# Altium PCB 175-00016_rev2 SuperFin GPIO Apps Board.PcbDoc (part 1 of 2)
Units mil, origin at the board's own origin, x right, y up, seen from the top; angles counter-clockwise.
Board outline 3307.09 x 1358.27 mil, 6 copper layers (Top Layer (*.GTL), Mid-Layer 1 (*.G1), Internal Plane 1 (*.GP1), Internal Plane 2 (GP2), Internal Plane 3 (GP3), Bottom Layer (GBL)); 57 components, 95 nets, 358 pads, 100 vias.
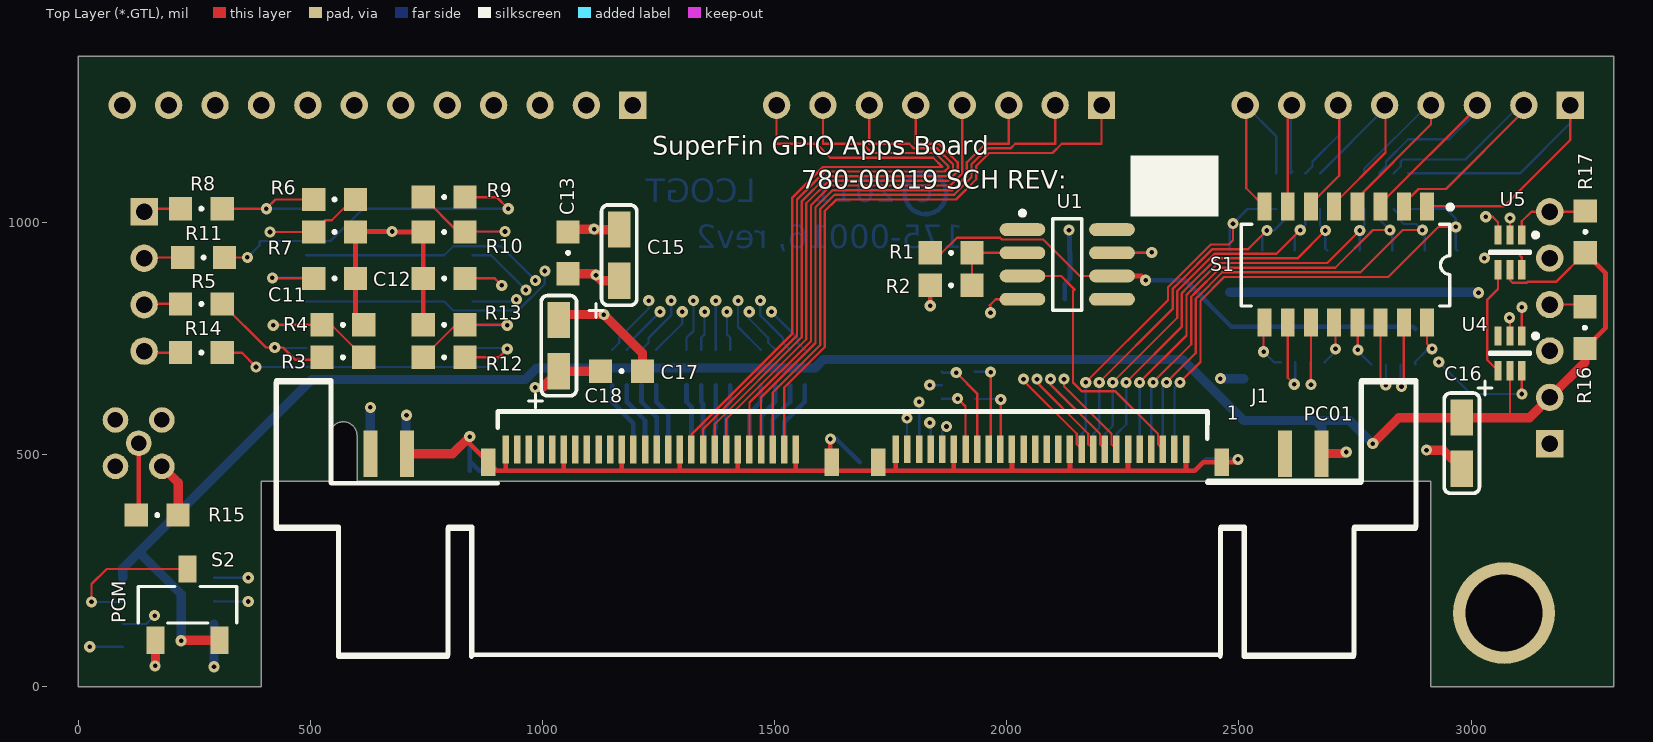
[diagram p0: Top Layer (*.GTL) view]
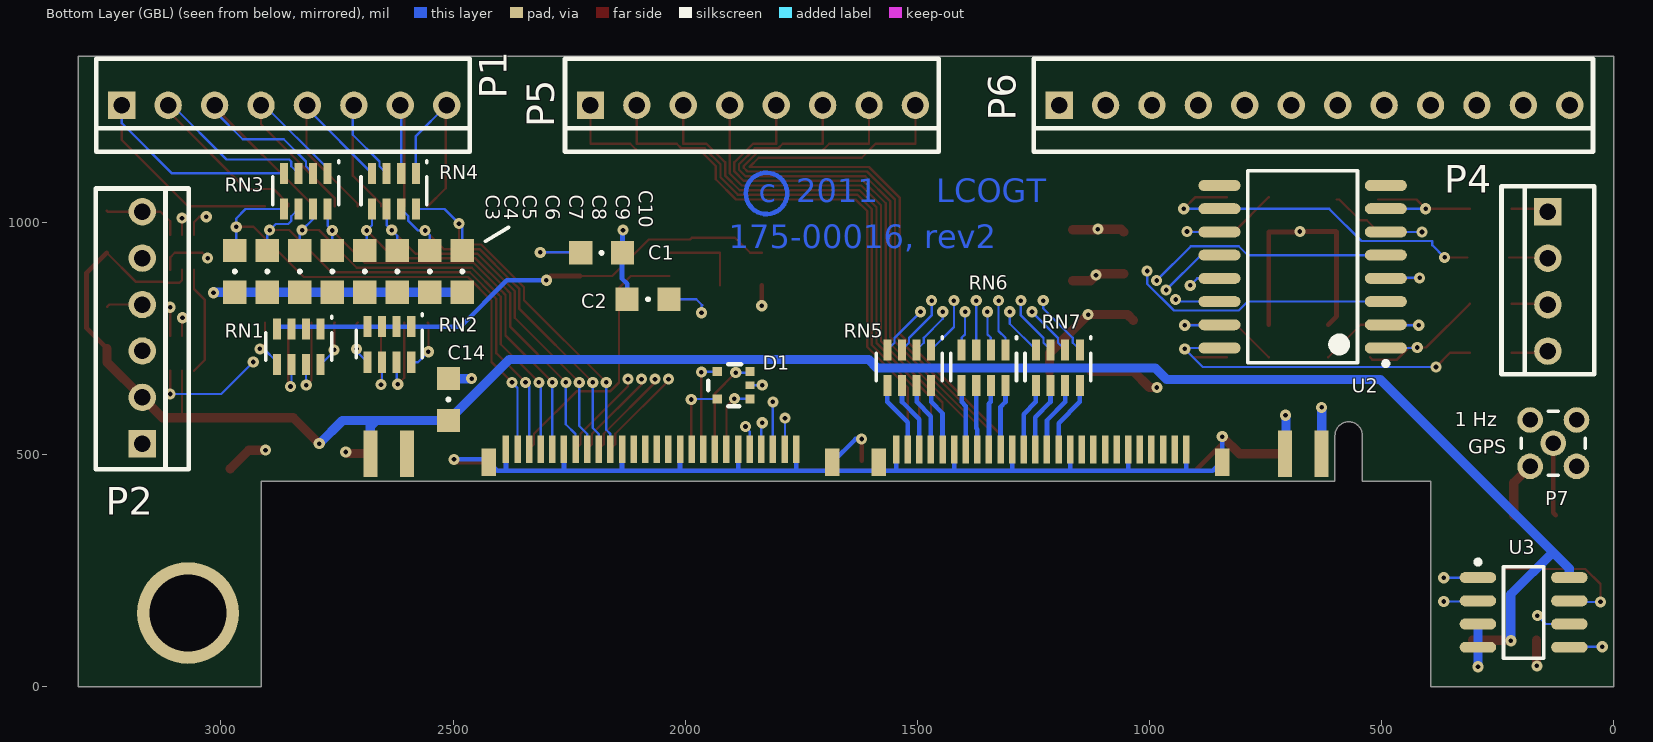
[diagram p1: Bottom Layer (GBL) view, seen from below]
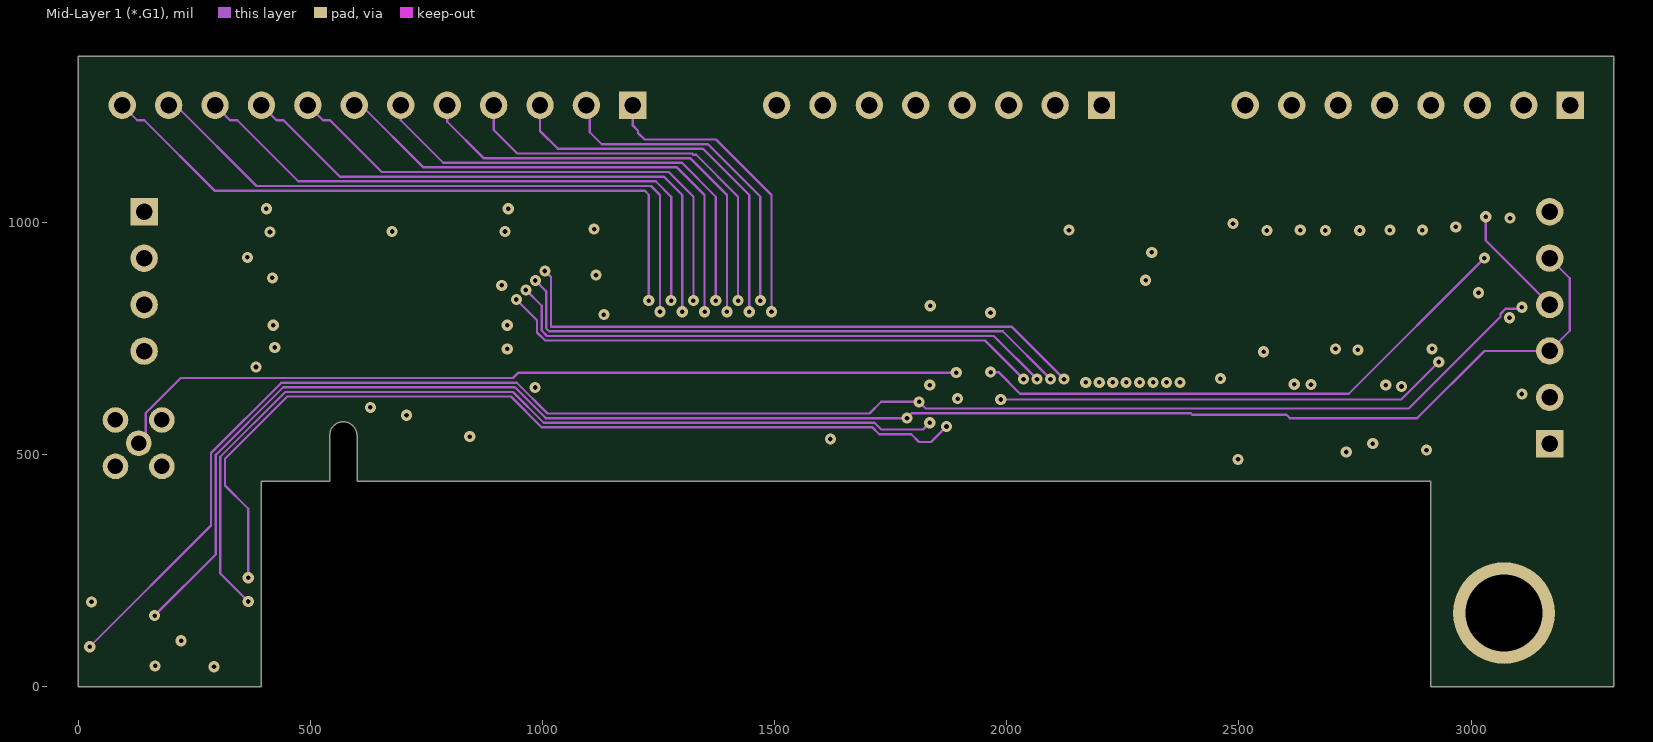
[diagram p2: Mid-Layer 1 (*.G1)]
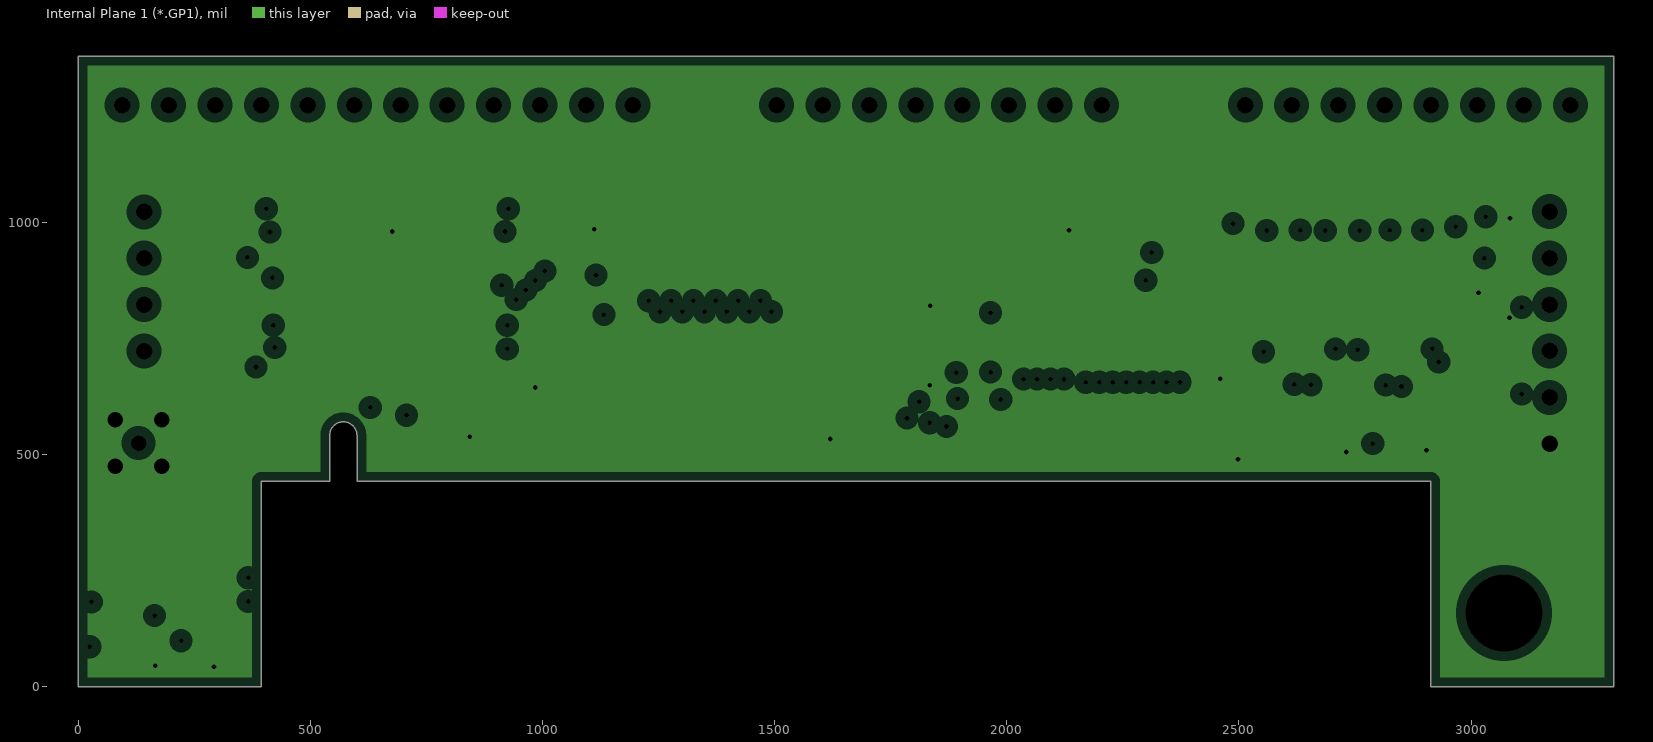
[diagram p3: Internal Plane 1 (*.GP1), clearances drawn from the general rule]
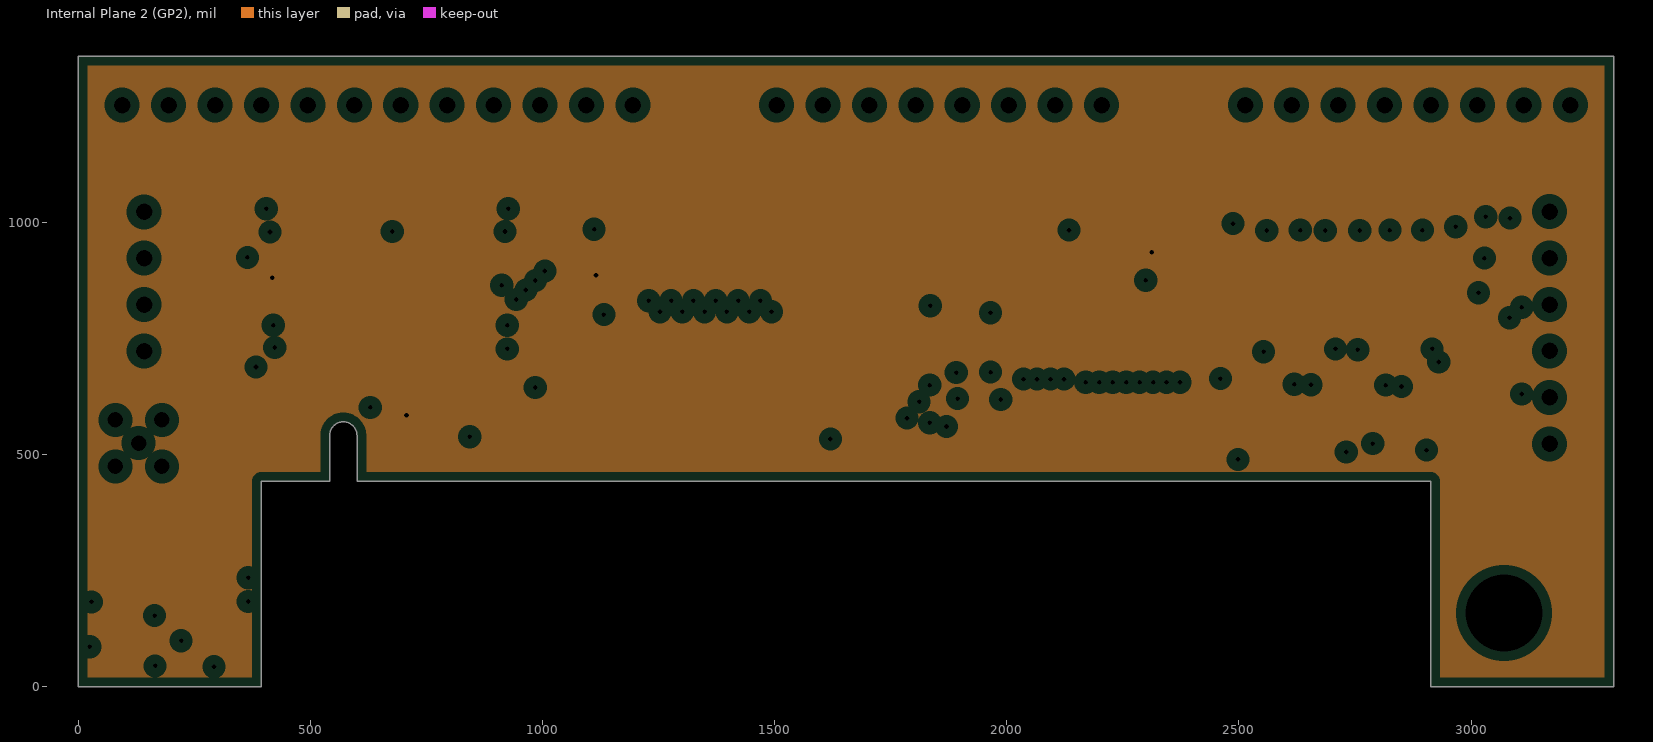
[diagram p4: Internal Plane 2 (GP2), clearances drawn from the general rule]
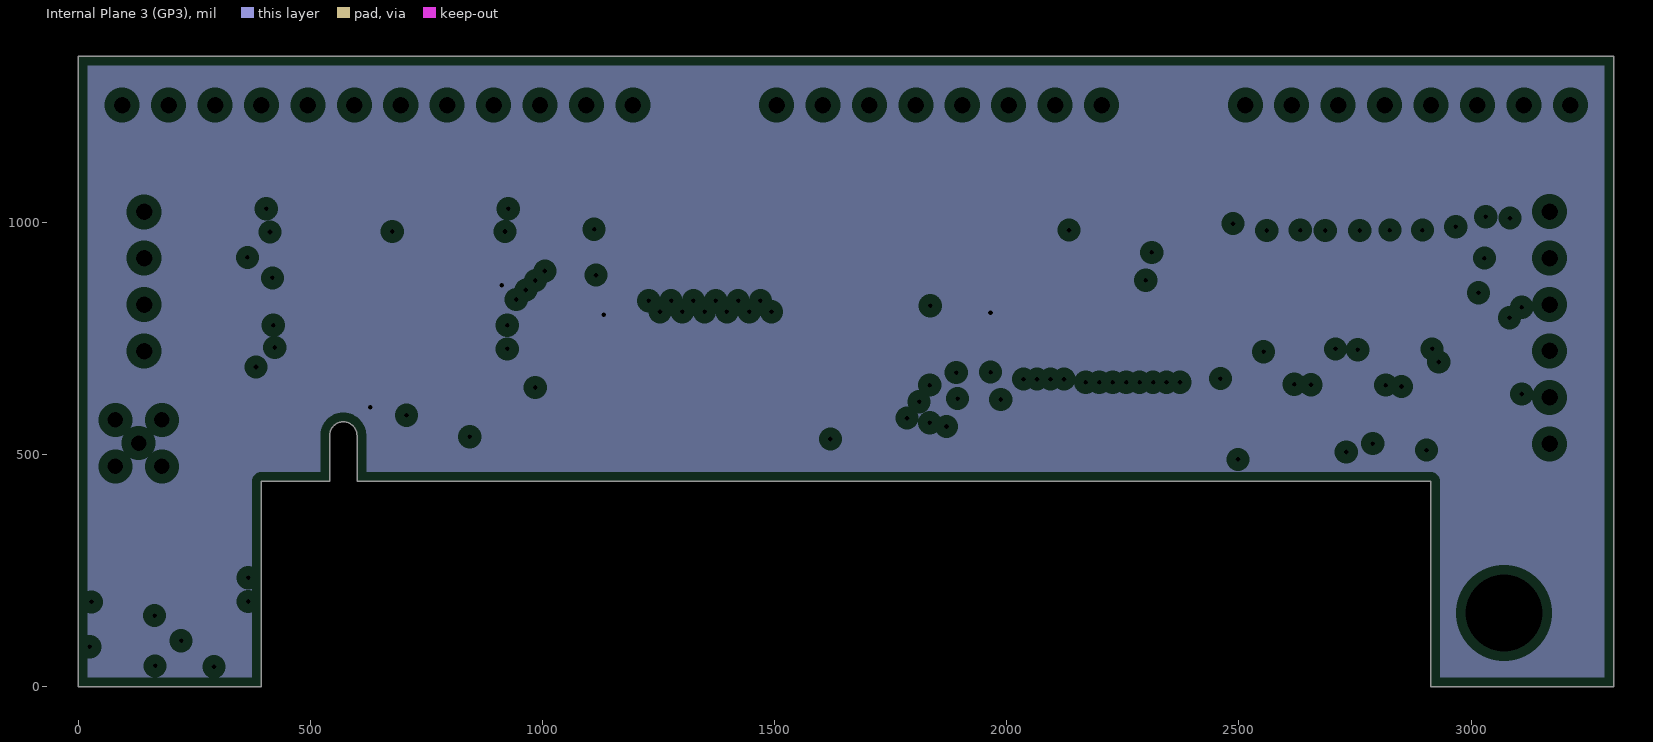
[diagram p5: Internal Plane 3 (GP3), clearances drawn from the general rule]

## Layer stack, top to bottom
Top Layer (*.GTL): signal copper 1.4
Dielectric: core 12.6, FR-4, Dk 4.8
Mid-Layer 1 (*.G1): signal copper 1.4
Dielectric: prepreg 12.6, FR-4, Dk 4.8
Internal Plane 1 (*.GP1): plane copper 1.4, net GND
Dielectric: core 12.6, FR-4, Dk 4.8
Internal Plane 2 (GP2): plane copper 1.4, net +12V
Dielectric: prepreg 12.6, FR-4, Dk 4.8
Internal Plane 3 (GP3): plane copper 1.4, net -12V
Dielectric: core 12.6, FR-4, Dk 4.8
Bottom Layer (GBL): signal copper 1.4

## Board outline
0,0 0,1358.27 3307.09,1358.27 3307.09,442.91 3307.09,0 2913.39,0 2913.39,442.91 600.29,442.91 600.29,541.34 ccw(c570.77,541.34) 541.24,541.34 541.24,442.91 393.7,442.91 393.7,0

## Design rules (kind name [scope] priority, off if disabled: settings)
Clearance [All] p1: gap=5
ComponentClearance ComponentClearance_1 [(InComponent('J1'))] p1: gap=-393.7 collisioncheckmode=3 verticalgap=-393.7 showdistances=FALSE
ComponentClearance [All] p2: gap=10 collisioncheckmode=3 verticalgap=10 showdistances=FALSE
HoleSize [All] p1: absolutevalues=TRUE maxlimit=250 minlimit=1 maxpercent=80.000 minpercent=20.000
MinimumSolderMaskSliver [All] p1: minsoldermaskwidth=1
PlaneClearance [All] p1: clearance=20
PlaneConnect [All] p1: planeconnectstyle=Relief reliefexpansion=20 reliefentries=4 reliefconductorwidth=10 reliefairgap=10
PolygonConnect [All] p1: connectstyle=Relief reliefconductorwidth=10 reliefentries=4 polygonreliefangle="90 Angle"
RoomDefinition "780-00019 Rev2 Pg1" [InComponentClass('780-00019 Rev2 Pg1')] p1: confinementstyle=ConfineIn formatcopy=TRUE lockcomponents=FALSE outline 22.36,40 4064.69,40 4064.69,1368.74 22.36,1368.74
RoutingVias [All] p1: holewidth=10 width=24 viastyle="Through Hole" minholewidth=10 minwidth=24 maxholewidth=28 maxwidth=50
SilkToSilkClearance [All] p1: silktosilkclearance=1
SilkscreenOverComponentPads [All] p1: minsilkscreentomaskgap=1
SolderMaskExpansion [All] p1: expansion=4
Width [All] p1: maxlimit=20 minlimit=5 preferedwidth=5
21 further rules are at their usual default settings.

## Components (designator, comment, footprint, x,y, rotation, side; value= is the part's Value field where it differs from the comment)
C1 "Cap SMD" SMD_0805 2180,935 r180 bottom
C2 "Cap SMD" SMD_0805 2080,835 r0 bottom
C3 "Cap SMD" SMD_0805 2970,895 r90 bottom
C4 "Cap SMD" SMD_0805 2900,895 r90 bottom
C5 "Cap SMD" SMD_0805 2830,895 r90 bottom
C6 "Cap SMD" SMD_0805 2760,895 r90 bottom
C7 "Cap SMD" SMD_0805 2690,895 r90 bottom
C8 "Cap SMD" SMD_0805 2620,895 r90 bottom
C9 "Cap SMD" SMD_0805 2550,895 r90 bottom
C10 "Cap SMD" SMD_0805 2480,895 r90 bottom
C11 "Cap SMD" SMD_0805 551.89,880 r0 top
C12 "Cap SMD" SMD_0805 788.11,880 r180 top
C13 "Cap SMD" SMD_0805 1055,935 r90 top
C14 "Cap SMD" SMD_0805 2510,619 r90 bottom
C15 "16V" SMD_CAP_3216 1165,930 r270 top
C16 "16V" SMD_CAP_3216 2980,525 r90 top
C17 "Cap SMD" SMD_0805 1170,680 r0 top
C18 "16V" SMD_CAP_3216 1035,735 r270 top
D1 "PESD3V3L4UG" SOT-353 1860,620 r0 bottom
J1 "QMSS-EM-PC4-104pin" "QMS EDGE PWR PINS - 104 pin" 1653.54,442.91 r0 top locked
P1 "Header 8" "HDR1X8 for IDC" 3213.58,1252.95 r180 bottom
P2 "Header 6" "HDR1X6 for IDC" 3169.29,523.62 r90 bottom
P4 "Header 4" "HDR1X4 for IDC" 141.73,1023.35 r270 bottom
P5 "Header 8" "HDR1X8 for IDC" 2203.94,1252.95 r180 bottom
P6 "Header 12" "HDR1X12 for IDC" 1194.49,1252.95 r180 bottom
P7 "COAX MMCX" MMCX2.54-V5 130,525 r180 bottom
R1 "Res 0805" SMD_0805 1880,935 r180 top
R2 "Res 0805" SMD_0805 1880,865 r0 top
R3 "Res 0805" SMD_0805 570,710 r180 top
R4 "Res 0805" SMD_0805 570,780 r180 top
R5 "Res 0805" SMD_0805 265,825 r0 top
R6 "Res 0805" SMD_0805 551.89,1050 r180 top
R7 "Res 0805" SMD_0805 551.89,980 r180 top
R8 "Res 0805" SMD_0805 265,1030 r0 top
R9 "Res 0805" SMD_0805 788.11,1055 r0 top
R10 "Res 0805" SMD_0805 788.11,980 r0 top
R11 "Res 0805" SMD_0805 270,925 r0 top
R12 "Res 0805" SMD_0805 788.11,710 r0 top
R13 "Res 0805" SMD_0805 788.11,780 r0 top
R14 "Res 0805" SMD_0805 265,720 r0 top
R15 "Res 0805" SMD_0805 170,370 r180 top
R16 "Res 0805" SMD_0805 3245.08,773.62 r270 top
R17 "Res 0805" SMD_0805 3246.06,980.31 r270 top
RN1 "RES ARRAY  x4 10K" "RES ARRAY 0603 x 4" 2785,775 r0 bottom
RN2 "RES ARRAY  x4 10K" "RES ARRAY 0603 x 4" 2590,780 r0 bottom
RN3 "RES ARRAY  x4 10K" "RES ARRAY 0603 x 4" 2770,1110 r0 bottom
RN4 "RES ARRAY  x4 10K" "RES ARRAY 0603 x 4" 2580,1110 r0 bottom
RN5 "RES ARRAY  x4 10K" "RES ARRAY 0603 x 4" 1470,730 r0 bottom
RN6 "RES ARRAY  x4 10K" "RES ARRAY 0603 x 4" 1310,730 r0 bottom
RN7 "RES ARRAY  x4 10K" "RES ARRAY 0603 x 4" 1150,730 r0 bottom
S1 "SW DIP-8 Half Pitch" "SW DIP 8 pos half pitch" 2730,910 r270 top
S2 "CJS-1200TB" CAS-120B 235.24,177.17 r0 top
U1 "LT1007CS8#PBF" S8_M 2130,910 r0 top
U2 "LT1014ISW#PBF" SW16_N 670,905 r0 bottom
U3 "M24C32RMN1" SOP8_N 193.9,160.43 r180 bottom
U4 "NC7SB3257" SC70-LT6_M 3083.66,718.5 r270 top
U5 "NC7SB3257" SC70-LT6_M 3083.66,936.02 r270 top

## Footprints (in the part's own frame and the unit in brackets; to place one, negate y for a bottom-side part, rotate by r counter-clockwise, add the part's x,y. Pads: shape width x height; smd on the part's side, far side on the other; paste and mask are expansions set on the pad)
CAS-120B [mm] "Copal Electronics CAS SMD Slide Switch"
  rect 1x1.5 smd: 1(-1.75,-1.95) 2(0,1.95) 3(1.75,-1.95)
  silkscreen extent -2.69,-1 2.69,1
"HDR1X4 for IDC" [mm] "Connector; Header; 4 Position"
  rect 1.5x1.5 hole 0.9: 1(0,0)
  round 1.5 hole 0.9: 2(2.54,0) 3(5.08,0) 4(7.62,0)
  silkscreen extent -1.4,-2.54 8.89,2.54
"HDR1X6 for IDC" [mm] "Connector; Header; 6 Position"
  rect 1.5x1.5 hole 0.9: 1(0,0)
  round 1.5 hole 0.9: 2(2.54,0) 3(5.08,0) 4(7.62,0) 5(10.16,0) 6(12.7,0)
  silkscreen extent -1.4,-2.54 13.97,2.54
"HDR1X8 for IDC" [mm] "Connector; Header; 8 Position"
  rect 1.5x1.5 hole 0.9: 1(0,0)
  round 1.5 hole 0.9: 2(2.54,0) 3(5.08,0) 4(7.62,0) 5(10.16,0) 6(12.7,0) 7(15.24,0) 8(17.78,0)
  silkscreen extent -1.4,-2.54 19.05,2.54
"HDR1X12 for IDC" [mm] "Connector; Header; 12 Position"
  rect 1.5x1.5 hole 0.9: 1(0,0)
  round 1.5 hole 0.9: 2(2.54,0) 3(5.08,0) 4(7.62,0) 5(10.16,0) 6(12.7,0) 7(15.24,0) 8(17.78,0) 9(20.32,0) 10(22.86,0) 11(25.4,0) 12(27.94,0)
  silkscreen extent -1.4,-2.54 29.21,2.54
MMCX2.54-V5 [mm] "Connector; RF Coaxial, MMCX, Thru-Hole; 5 Position; Vertical"
  round 1.4 hole 0.85: 1(0,0) 2(-1.27,-1.27) 3(1.27,-1.27) 4(1.27,1.27) 5(-1.27,1.27)
  silkscreen extent -1.75,-1.75 1.75,1.75
"QMS EDGE PWR PINS - 104 pin" [mil] "52 pos (104 pin) + 8 pwr pins"
  rect 14x60 smd: 0(132.45,69.15) 1(732.45,69.15) 3(707.45,69.15) 5(682.45,69.15) 7(657.45,69.15) 9(632.45,69.15) 11(607.45,69.15) 13(582.45,69.15) 15(557.45,69.15) 17(532.45,69.15) 19(507.45,69.15) 21(482.45,69.15) 23(457.45,69.15) 25(432.45,69.15) 27(407.45,69.15) 29(382.45,69.15) 31(357.45,69.15) 33(332.45,69.15) 35(307.45,69.15) 37(282.45,69.15) 39(257.45,69.15) 41(232.45,69.15) 43(207.45,69.15) 45(182.45,69.15) 47(157.45,69.15) 51(107.45,69.15) 53(-107.89,68.09) 55(-132.89,68.09) 57(-157.89,68.09) 59(-182.89,68.09) 61(-207.89,68.09) 63(-232.89,68.09) 65(-257.89,68.09) 67(-282.89,68.09) 69(-307.89,68.09) 71(-332.89,68.09) 73(-357.89,68.09) 75(-382.89,68.09) 77(-407.89,68.09) 79(-432.89,68.09) 81(-457.89,68.09) 83(-482.89,68.09) 85(-507.89,68.09) 87(-532.89,68.09) 89(-557.89,68.09) 91(-582.89,68.09) 93(-607.89,68.09) 95(-632.89,68.09) 97(-657.89,68.09) 99(-682.89,68.09) 101(-707.89,68.09) 103(-732.89,68.09)
  rect 14x60 smd far side: 2(732.45,69.15) 4(707.45,69.15) 6(682.45,69.15) 8(657.45,69.15) 10(632.45,69.15) 12(607.45,69.15) 14(582.45,69.15) 16(557.45,69.15) 18(532.45,69.15) 20(507.45,69.15) 22(482.45,69.15) 24(457.45,69.15) 26(432.45,69.15) 28(407.45,69.15) 30(382.45,69.15) 32(357.45,69.15) 34(332.45,69.15) 36(307.45,69.15) 38(282.45,69.15) 40(257.45,69.15) 42(232.45,69.15) 44(207.45,69.15) 46(182.45,69.15) 48(157.45,69.15) 50(132.45,69.15) 52(107.45,69.15) 54(-107.89,68.09) 56(-132.89,68.09) 58(-157.89,68.09) 60(-182.89,68.09) 62(-207.89,68.09) 64(-232.89,68.09) 66(-257.89,68.09) 68(-282.89,68.09) 70(-307.89,68.09) 72(-332.89,68.09) 74(-357.89,68.09) 76(-382.89,68.09) 78(-407.89,68.09) 80(-432.89,68.09) 82(-457.89,68.09) 84(-482.89,68.09) 86(-507.89,68.09) 88(-532.89,68.09) 90(-557.89,68.09) 92(-582.89,68.09) 94(-607.89,68.09) 96(-632.89,68.09) 98(-657.89,68.09) 100(-682.89,68.09) 102(-707.89,68.09) 104(-732.89,68.09)
  rect 31x60 smd: 105(809.45,41.09) 107(69.45,41.09) 109(-30.55,41.09) 111(-770.55,41.09)
  rect 31x60 smd far side: 106(769.45,41.09) 108(29.45,41.09) 110(-70.55,41.09) 112(-810.55,41.09)
  rect 30x100 smd: PC01(1024.45,59.65) PC03(945.55,59.65) PC05(-945.55,59.15) PC07(-1024.45,59.15)
  rect 30x100 smd far side: PC02(1024.45,59.65) PC04(945.55,59.65) PC06(-945.55,59.15) PC08(-1024.45,59.15)
  silkscreen extent -1228,-377 1229,217
"RES ARRAY 0603 x 4" [mm]
  rect 0.44x1.15 smd: 1(0,0.1) 2(0,2.05) 3(0.8,0.1) 4(0.8,2.05) 5(1.6,0.1) 6(1.6,2.05) 7(2.4,0.1) 8(2.4,2.05)
  silkscreen extent -0.6,-0.6 3,1.8
S8_M [mm] "SOIC, 8-Leads, Body 4.9x3.9mm, Pitch 1.27mm, IPC Low Density"
  oval 2.5x0.7 smd: 1(-2.45,1.905) 2(-2.45,0.635) 3(-2.45,-0.635) 4(-2.45,-1.905) 5(2.45,-1.905) 6(2.45,-0.635) 7(2.45,0.635) 8(2.45,1.905)
  silkscreen extent -2.57,-2.5 0.8,2.93, body extent -2,-2.5 2,2.5, height 1.76
SC70-LT6_M [mm] "SOT363, 6-Leads, Body 2x1.3mm, Pitch 0.65mm, Lead Span 2.1mm, IPC Low Density"
  rect 1.05x0.4 smd: 1(-0.95,0.65) 2(-0.95,0) 3(-0.95,-0.65) 4(0.95,-0.65) 5(0.95,0) 6(0.95,0.65)
  silkscreen extent -1.07,-1.1 0.05,1.53, body extent -0.7,-1.1 0.7,1.1, height 1.1
SMD_0805 [mil]
  rect 50x50 smd: 1(-45,0) 2(45,0)
  silkscreen extent -1,-1 1,1
SMD_CAP_3216 [mil]
  rect 78x48 smd: 1(55,0) 2(-55,0)
  silkscreen extent -108,-65 134,38
SOP8_N [mm] "SOIC, 8-Leads, Body 4.9x3.9mm, Pitch 1.27mm, IPC Medium Density"
  oval 2x0.6 smd: 1(-2.5,1.905) 2(-2.5,0.635) 3(-2.5,-0.635) 4(-2.5,-1.905) 5(2.5,-1.905) 6(2.5,-0.635) 7(2.5,0.635) 8(2.5,1.905)
  silkscreen extent -2.63,-2.5 1.1,2.88, body extent -2,-2.5 2,2.5, height 1.75
SOT-353 [mm]
  rect 0.5x0.5 smd: 1(0,0) 3(0,-1.5) 4(1.8,-1.5) 5(1.8,0)
  rect 0.5x0.4 smd: 2(0,-0.75)
  silkscreen extent 0.5,-1.9 2.3,0.4
SW16_N [mm] "SOIC, 16-Leads, Body 10.3x7.5mm, Pitch 1.27mm, IPC Medium Density"
  oval 2.3x0.6 smd: 1(-4.55,4.445) 2(-4.55,3.175) 3(-4.55,1.905) 4(-4.55,0.635) 5(-4.55,-0.635) 6(-4.55,-1.905) 7(-4.55,-3.175) 8(-4.55,-4.445) 9(4.55,-4.445) 10(4.55,-3.175) 11(4.55,-1.905) 12(4.55,-0.635) 13(4.55,0.635) 14(4.55,1.905) 15(4.55,3.175) 16(4.55,4.445)
  silkscreen extent -4.67,-5.25 3,5.42, body extent -3.75,-5.25 3.75,5.25, height 2.65
"SW DIP 8 pos half pitch" [mil] "Grayhill 97C08ST, 8 SPST switch, surface mount"
  rect 60x30 smd: 1(-125,175) 2(-125,125) 3(-125,75) 4(-125,25) 5(-125,-25) 6(-125,-75) 7(-125,-125) 8(-125,-175) 9(125,-175) 10(125,-125) 11(125,-75) 12(125,-25) 13(125,25) 14(125,75) 15(125,125) 16(125,175)
  silkscreen extent -128,-225 90,230

## Part data
C1 C2 C11 C12 C13 C14 C17: "Capacitor"
C3 C4 C5 C6 C7 C8 C9 C10: "Capacitor NP0"
C15 C16 C18: library part "Cap Tant 16V", "outline 3.2mm x 1.6mm"
D1: library part "ESD Diode 3.3V Quad", "Quad ESD Diode 3.3V"
J1: "SAMTEC QMSS EDGE W/PWR PINS"
P1 P5: "Header, 8-Pin"
P2: "Header, 6-Pin"
P4: "Header, 4-Pin"
P6: "Header, 12-Pin"
P7: library part COAX-M, "RF Coaxial PCB Connector, MMCX; Thru-Hole, Vertical Mount Plug,  50 Ohm Impedance"
R1 R2 R3 R4 R5 R6 R7 R8 R9 R10 R11 R12 R13 R14 R15 R16 R17: library part "Res SMD", "Resistor 0805"
RN1 RN2 RN3 RN4 RN5 RN6 RN7: "Resistor Array 4 Isolated"
S1: "DIP Switch, 8 Position, SPST"
S2: library part SW_SPDT_DOUG
U1: "Low Noise BJT input opamp"
U2: "Quad Precision Operational Amplifier"
U3: "32 Kbit Serial I²C Bus EEPROM"
U4 U5: library part "MUX 2:1", "Mux/Demux Bus Switch"

## Free pads (board coordinates)
  round 218.9 hole 166.14: 0(3070.87,159.06)

## Via types
v1: diameter 24, hole 10, Top Layer (*.GTL) to Bottom Layer (GBL), 100 vias

## Nets (pads, with @x,y where several pads share a name; then routed paths per layer and width w, separated by ;. In a path a pad name is that pad's centre, name@x,y a point inside that pad or via, vN(x,y) a via of type N, cw(c..) or ccw(c..) an arc to the next point about the centre after c; other vN are vias at no path point)
2.500VREF: J1.5 U1.3 | length 592.3
  Top Layer (*.GTL) w5: U1.3@2033.54,885 2117,885 2146,856 2142.5,852.5 2142.5,655.92 2161.92,636.5 2234.16,636.5 2325.49,545.17 2325.49,522.56 J1.5@2335.99,512.06
4.096VREF: J1.3
+3.3V: C14.1 C16.1 J1.PC02 P2.2 R16.2 R17.2 S2.3 U3.8 U4.5 U5.5 | length 4480.7
  Top Layer (*.GTL) w5: 3083.66,580 U4.5@3083.66,681.1 ; U5.5@3083.66,898.62 3083.66,875.98 3089.19,870.45 3120.23,870.45 3122.81,873.03 3183.78,873.03 R17.2@3246.06,935.32
  Top Layer (*.GTL) w10: 3046.1,579.1 3047,580 ; R16.2@3245.08,728.62 3289.37,772.91 3289.37,892.01 R17.2@3246.06,935.32
  Top Layer (*.GTL) w20: v1(221.46,99.41) 222.44,100.39 S2.3@304.13,100.39 ; v1(2788,524) 2844,580 C16.1@2980,580 3047,580 3083.66,580 3125.67,580 P2.2@3169.29,623.62 3245.08,699.41 R16.2@3245.08,728.62
  Bottom Layer (GBL) w20: U3.8@95.47,235.43 95.47,254.92 130.91,290.35 ; v1(221.46,99.41) 221.46,199.8 130.91,290.35 ; J1.PC02@2677.99,502.56 2677.99,559.99 2679,561 2666,574 ; v1(2788,524) 2738,574 2666,574 ; 130.91,290.35 502.55,662 962.82,662 987.75,686.93 1586.65,686.93 1604.72,705 2379,705 C14.1@2510,574 2666,574
+5V: J1.PC04
+12V: C1.1 C11.1 C13.1 C15.1 J1.PC06 U1.7 U2.4 | length 536.3
  Top Layer (*.GTL) w5: v1(418,881) 419,880 C11.1@506.89,880 ; U1.7@2226.46,935 2311,935 v1(2312,936)
  Top Layer (*.GTL) w20: C13.1@1055,890 1112,890 v1(1115,887) 1127,875 C15.1@1165,875
  Bottom Layer (GBL) w5: v1(418,881) 489.87,881 U2.4@490.87,880 ; C1.1@2225,935 2226,936 v1(2312,936)
  Bottom Layer (GBL) w20: v1(707,585) 706,584 706,504.05 J1.PC06@707.99,502.06
+24V: J1.PC07
+48V: J1.PC03
-12V: C2.1 C12.1 C17.2 C18.2 J1.PC08 U1.4 U2.13 | length 699.2
  Top Layer (*.GTL) w5: C12.1@833.11,880 897,880 v1(912,865) ; v1(1964.65,806) 1964.65,820.35 1963,822 1976,835 U1.4@2033.54,835
  Top Layer (*.GTL) w20: C18.2@1035,790 1047,802 v1(1132,802) 1215,719 C17.2@1215,680
  Bottom Layer (GBL) w5: U2.13@849.13,880 897,880 v1(912,865) ; v1(1964.65,806) 1964.65,820.35 1963,822 1976,835 C2.1@2035,835
  Bottom Layer (GBL) w20: v1(629,602) 629.09,601.91 J1.PC08@629.09,502.06
ANALOG_IN0: C3.2 J1.4 RN3.8 | length 1140.2
  Top Layer (*.GTL) w5: v1(2372.99,656) 2417,700.01 2417,832 2468,883 2821.58,883 2929.58,991 v1(2967,991)
  Bottom Layer (GBL) w5: J1.4@2360.99,512.06 2360.99,644 v1(2372.99,656) ; RN3.8@2864.49,1029.29 2946.71,1029.29 2967,1009 v1(2967,991) 2967,943 C3.2@2970,940
ANALOG_IN1: C4.2 J1.6 RN3.6 | length 1035.7
  Top Layer (*.GTL) w5: v1(2343.99,656) 2407,719.01 2407,836.14 2409.93,839.07 2463.86,893 2761.58,893 2852.58,984 v1(2895,984)
  Bottom Layer (GBL) w5: J1.6@2335.99,512.06 2335.99,648 v1(2343.99,656) ; RN3.6@2832.99,1029.29 2848.33,1013.96 2848.33,1003.55 2854.87,997 2882,997 v1(2895,984) 2900,979 C4.2@2900,940
ANALOG_IN2: C5.2 J1.8 RN3.4 | length 952.5
  Top Layer (*.GTL) w5: v1(2314.99,656) 2397,738.01 2397,840.28 2402.86,846.14 2459.72,903 2707.58,903 2788.58,984 v1(2825,984)
  Bottom Layer (GBL) w5: J1.8@2310.99,512.06 2310.99,652 v1(2314.99,656) ; RN3.4@2801.5,1029.29 2801.5,1007.5 v1(2825,984) 2830,979 C5.2@2830,940
ANALOG_IN3: C6.2 J1.10 RN3.2 | length 898
  Top Layer (*.GTL) w5: v1(2285.99,656) 2387,757.01 2387,844.43 2395.79,853.21 2455.57,913 2690,913 v1(2760,983)
  Bottom Layer (GBL) w5: J1.10@2285.99,512.06 v1(2285.99,656) ; C6.2@2760,940 v1(2760,983) 2770,993 RN3.2@2770,1029.29
ANALOG_IN4: C7.2 J1.14 RN4.8 | length 855.3
  Top Layer (*.GTL) w5: v1(2256.99,656) 2377,776.01 2377,848.57 2388.72,860.28 2451.43,923 2626,923 v1(2686,983)
  Bottom Layer (GBL) w5: J1.14@2235.99,512.06 2235.99,544.91 2256.99,565.91 v1(2256.99,656) ; RN4.8@2674.49,1029.29 2674.49,994.51 v1(2686,983) 2686,944 C7.2@2690,940
ANALOG_IN5: C8.2 J1.16 RN4.6 | length 823.5
  Top Layer (*.GTL) w5: v1(2227.99,656) 2367,795.01 2367,852.71 2381.64,867.36 2447.29,933 2581,933 v1(2632,984)
  Bottom Layer (GBL) w5: J1.16@2210.99,512.06 2210.99,544.91 2227.99,561.91 v1(2227.99,656) ; C8.2@2620,940 2620,972 v1(2632,984) 2642.99,994.99 RN4.6@2642.99,1029.29
ANALOG_IN6: C9.2 J1.18 RN4.4 | length 794.8
  Top Layer (*.GTL) w5: v1(2198.99,656) 2357,814.01 2357,856.85 2374.57,874.43 2443.15,943 2520,943 v1(2560,983)
  Bottom Layer (GBL) w5: J1.18@2185.99,512.06 2185.99,544.91 2198.99,557.91 v1(2198.99,656) ; C9.2@2550,940 2550,973 v1(2560,983) 2575.61,983 2596.16,1003.55 2596.16,1013.96 RN4.4@2611.5,1029.29
ANALOG_IN7: C10.2 J1.20 RN4.2 | length 810.7
  Top Layer (*.GTL) w5: v1(2169.99,656) 2347,833.01 2347,860.99 2367.5,881.5 2439.01,953 2478,953 2487,962 v1(2487,998)
  Bottom Layer (GBL) w5: J1.20@2160.99,512.06 2160.99,544.91 2169.99,553.91 v1(2169.99,656) ; C10.2@2480,940 2480,991 v1(2487,998) 2518.29,1029.29 RN4.2@2580,1029.29
DAC_OUT0: J1.13 U2.3 | length 2048.6
  Top Layer (*.GTL) w5: v1(2123,663) 2123,647.66 2225.49,545.17 2225.49,522.56 J1.13@2235.99,512.06
  Mid-Layer 1 (*.G1) w5: v1(1005,896) 1018,883 1018,776 2010,776 v1(2123,663)
  Bottom Layer (GBL) w5: U2.3@490.87,830 788.36,830 807.67,810.69 947.27,810.69 1005,868.42 v1(1005,896)
DAC_OUT1: J1.15 U2.5 | length 1976.1
  Top Layer (*.GTL) w5: v1(2094,663) 2094,651.66 2200.49,545.17 2200.49,522.56 J1.15@2210.99,512.06
  Mid-Layer 1 (*.G1) w5: v1(984.49,875.49) 1008,851.99 1008,771.86 1013.86,766 1991,766 v1(2094,663)
  Bottom Layer (GBL) w5: U2.5@490.87,930 788.36,930 807.67,949.31 910.68,949.31 v1(984.49,875.49)
DAC_OUT2: J1.17 U2.12 | length 1558.7
  Top Layer (*.GTL) w5: v1(2065,663) 2065,655.66 2175.49,545.17 2175.49,522.56 J1.17@2185.99,512.06
  Mid-Layer 1 (*.G1) w5: v1(963.99,854.99) 998,820.98 998,767.72 1009.72,756 1972,756 v1(2065,663)
  Bottom Layer (GBL) w5: U2.12@849.13,930 888.98,930 v1(963.99,854.99)
DAC_OUT3: J1.19 U2.14 | length 1474.6
  Top Layer (*.GTL) w5: v1@2036,659.66 2150.49,545.17 2150.49,522.56 J1.19@2160.99,512.06
  Mid-Layer 1 (*.G1) w5: v1(943.48,834.48) 988,789.96 988,763.57 1005.57,746 1953,746 v1(2036,663)
  Bottom Layer (GBL) w5: U2.14@849.13,830 939,830 v1(943.48,834.48)
GND: C1.2 C2.2 C3.1 C4.1 C5.1 C6.1 C7.1 C8.1 C9.1 C10.1 C11.2 C12.2 C13.2 C14.2 C15.2 C16.2 C17.1 C18.1 D1.2 J1.1 J1.2 J1.11 J1.12 J1.21 J1.22 J1.31 J1.32 J1.41 J1.42 J1.51 J1.52 J1.53 J1.54 J1.63 J1.64 J1.73 J1.74 J1.83 J1.84 J1.93 J1.94 J1.103 J1.104 J1.105 J1.106 J1.107 J1.108 J1.109 J1.110 J1.111 J1.112 J1.PC01 J1.PC05 P2.1 P7.2 P7.3 P7.4 P7.5 R2.1 R4.1 R7.1 R10.1 R13.1 R15.1 S2.1 U3.3 U3.4 U4.2 U5.2 | length 6977.4
  Top Layer (*.GTL) w5: v1(3082.68,795.28) 3083.66,794.29 U4.2@3083.66,755.91 ; U5.2@3083.66,973.43 v1(3083.66,1009.84)
  Top Layer (*.GTL) w10: R4.1@615,780 596.89,798.11 C11.2@596.89,880 R7.1@596.89,980 597.89,981 v1(676,981) 677,980 R10.1@743.11,980 C12.2@743.11,880 R13.1@743.11,780 ; J1.PC05@707.99,467.92 J1.PC05@707.99,502.06 ; v1(843,539) 843,524 J1.111@882.99,484 901.44,465.55 920.65,465.55 ; J1.103@920.65,511 920.65,465.55 ; J1.93@1045.65,511 1045.65,465.55 ; J1.83@1170.65,511 1170.65,465.55 ; J1.73@1295.65,511 1295.65,465.55 ; J1.63@1420.65,511 1420.65,465.55 ; J1.53@1545.65,511 1545.65,465.55 ; J1.109@1620,487 v1(1620,534) ; 1760.99,466.61 J1.51@1760.99,512.06 ; v1(1835,821) R2.1@1835,865 ; 1885.99,466.61 J1.41@1885.99,512.06 ; 2010.99,466.61 J1.31@2010.99,512.06 ; 2135.99,466.61 J1.21@2135.99,512.06 ; 2260.99,466.61 J1.11@2260.99,512.06 ; 2385.99,466.61 J1.1@2385.99,512.06 ; v1(2498,490) 2492,484 J1.105@2462.99,484 2422.99,484 2404.54,465.55 1545.65,465.55 ; 920.65,465.55 1045.65,465.55 ; 1045.65,465.55 1170.65,465.55 ; 1170.65,465.55 1295.65,465.55 ; 1295.65,465.55 1420.65,465.55 ; 1420.65,465.55 1545.65,465.55
  Top Layer (*.GTL) w20: v1(165.35,45.28) 166.34,46.26 S2.1@166.34,100.39 ; P7.2@180,475 215,440 R15.1@215,370 ; J1.PC05@707.99,502.06 806.06,502.06 v1(843,539) ; v1(984,645) 1000,645 C18.1@1035,680 C17.1@1125,680 ; C13.2@1055,980 1061,986 v1(1111,986) 1112,985 C15.2@1165,985 ; J1.PC01@2677.99,502.56 2727.56,502.56 v1(2731,506) ; v1(2904,510) 2940,510 C16.2@2980,470
  Bottom Layer (GBL) w5: v1(1834,650) 1834.47,649.53 D1.2@1860,649.53
  Bottom Layer (GBL) w10: J1.112@842.99,465.92 J1.112@842.99,484 J1.112@842.99,486.22 ; v1(843,539) J1.112@842.99,486.22 ; J1.104@920.65,511 920.65,465.93 920.28,465.55 ; 1045.65,465.93 J1.94@1045.65,511 ; 1170.65,465.93 J1.84@1170.65,511 ; 1295.65,465.93 J1.74@1295.65,511 ; 1420.65,465.93 J1.64@1420.65,511 ; 1545.65,465.93 J1.54@1545.65,511 ; v1(1620,534) 1633,534 J1.108@1682.99,484 ; 1760.99,466.99 J1.52@1760.99,512.06 ; 1885.99,466.99 J1.42@1885.99,512.06 ; 2010.99,466.99 J1.32@2010.99,512.06 ; C2.2@2125,835 2125,868 2136,879 2136,934 C1.2@2135,935 2135,983 v1(2134,984) ; 2135.99,466.99 J1.22@2135.99,512.06 ; 2260.99,466.99 J1.12@2260.99,512.06 ; 2385.99,466.99 J1.2@2385.99,512.06 ; v1(2498,490) 2428.99,490 J1.106@2422.99,484 2404.54,465.55 920.28,465.55 ; J1.112@842.99,486.22 863.66,465.55 920.28,465.55
  Bottom Layer (GBL) w20: v1(292.32,43.31) U3.4@292.32,85.43 U3.3@292.32,135.43 ; v1(2460,664) C14.2@2510,664 ; C10.1@2480,850 C9.1@2550,850 C8.1@2620,850 C7.1@2690,850 C6.1@2760,850 C5.1@2830,850 C4.1@2900,850 C3.1@2970,850 3015,850 v1(3016,849)
GP_I/OSPARE0: D1.5 J1.33 U4.6 | length 1396.9
  Top Layer (*.GTL) w5: J1.33@1987,513.07 v1(1987,619) ; v1(3109.25,630.91) U4.6@3109.25,681.1
  Mid-Layer 1 (*.G1) w5: v1(1987,619) 2849.58,619 v1(2930.38,699.8)
  Bottom Layer (GBL) w5: D1.5@1930.87,620 1986,620 v1(1987,619) ; v1(2930.38,699.8) 2999.28,630.91 v1(3109.25,630.91)
GP_I/OSPARE1: D1.4 J1.35 U5.6 | length 1516.4
  Top Layer (*.GTL) w5: J1.35@1965,516.07 v1(1965,678) ; v1(3028.62,923.62) 3040.04,935.04 3099.41,935.04 3109.25,925.2 U5.6@3109.25,898.62
  Mid-Layer 1 (*.G1) w5: v1(1965,678) 1982,678 2028.5,631.5 2736.5,631.5 v1(3028.62,923.62)
  Bottom Layer (GBL) w5: D1.4@1930.87,679.06 1963.94,679.06 v1(1965,678)
GP_I/OSPARE2: D1.3 J1.37 P7.1 R15.2 | length 2225.5
  Top Layer (*.GTL) w5: v1(1891,677) 1935.99,632.01 J1.37@1935.99,512.06
  Top Layer (*.GTL) w10: R15.2@125,370 130,375 P7.1@130,525
  Mid-Layer 1 (*.G1) w5: P7.1@130,525 144.94,539.94 144.94,589.52 220.77,665.35 936.35,665.35 948,677 v1(1891,677)
  Bottom Layer (GBL) w5: D1.3@1860,679.06 1862.06,677 v1(1891,677)
GP_I/OSPARE3: D1.1 J1.39 | length 150.4
  Top Layer (*.GTL) w5: v1(1894,621) 1910.99,604.01 J1.39@1910.99,512.06
  Bottom Layer (GBL) w5: D1.1@1860,620 1861,621 v1(1894,621)
GP_OUT_D0: J1.55 P5.1 | length 1305.7
  Top Layer (*.GTL) w5: J1.55@1520.65,511 1520.65,644.92 1608,732.27 1608,1025.01 1632.99,1050 1890.51,1050 1933.94,1093.43 1933.94,1121.72 1962.22,1150 2098.08,1150 2118.08,1170 2203.94,1170 P5.1@2203.94,1252.95
GP_OUT_D1: J1.57 P5.2 | length 1224.3
  Top Layer (*.GTL) w5: J1.57@1495.65,511 1495.65,634.06 1598,736.41 1598,1029.15 1628.85,1060 1886.36,1060 1923.94,1097.57 1923.94,1125.86 1958.08,1160 2008.08,1160 2018.08,1170 2103.94,1170 P5.2@2103.94,1252.95
GP_OUT_D2: J1.59 P5.3 | length 1143
  Top Layer (*.GTL) w5: J1.59@1470.65,511 1470.65,623.2 1588,740.55 1588,1033.29 1624.71,1070 1882.22,1070 1913.94,1101.72 1913.94,1130 1953.94,1170 2003.94,1170 P5.3@2003.94,1252.95
GP_OUT_D3: J1.61 P5.4 | length 1082.6
  Top Layer (*.GTL) w5: J1.61@1445.65,511 1445.65,612.35 1578,744.69 1578,1037.43 1620.57,1080 1878.08,1080 1903.94,1105.86 P5.4@1903.94,1252.95
GP_OUT_D4: J1.65 P5.5 | length 1165.8
  Top Layer (*.GTL) w5: J1.65@1395.65,511 1395.65,576.49 1568,748.84 1568,1041.57 1616.43,1090 1873.94,1090 1893.94,1110 1893.94,1130 1853.94,1170 1803.94,1170 P5.5@1803.94,1252.95
GP_OUT_D5: J1.67 P5.6 | length 1259.5
  Top Layer (*.GTL) w5: J1.67@1370.65,511 1370.65,565.63 1558,752.98 1558,1045.72 1612.28,1100 1869.79,1100 1883.94,1114.14 1883.94,1125.86 1849.79,1160 1799.79,1160 1789.79,1170 1703.94,1170 P5.6@1703.94,1252.95
GP_OUT_D6: J1.69 P5.7 | length 1353.3
  Top Layer (*.GTL) w5: J1.69@1345.65,511 1345.65,554.77 1548,757.12 1548,1049.86 1608.14,1110 1865.65,1110 1873.94,1118.28 1873.94,1121.72 1845.65,1150 1709.79,1150 1689.79,1170 1603.94,1170 P5.7@1603.94,1252.95
GP_OUT_D7: J1.71 P5.8 | length 1445.1
  Top Layer (*.GTL) w5: J1.71@1320.65,511 1320.65,543.91 1538,761.26 1538,1054 1604,1120 1861.51,1120 1841.51,1140 1619.79,1140 1589.79,1170 1503.94,1170 P5.8@1503.94,1252.95
I2C_SCL: J1.50 P2.3 P2.5 U3.6 | length 3808.6
  Mid-Layer 1 (*.G1) w5: v1(164.37,153.54) 295.94,285.12 295.94,499.78 441.52,645.35 940.33,645.35 1006.68,579 v1(1785,579) 1795.38,589.38 2396.31,589.38 2399.69,586 2602.25,586 2609.25,579 2884,579 3028.62,723.62 P2.3@3169.29,723.62 3212.6,766.93 3212.6,880.31 P2.5@3169.29,923.62
  Bottom Layer (GBL) w5: U3.6@95.47,135.43 146.26,135.43 v1(164.37,153.54) ; J1.50@1785,513.05 v1(1785,579)
I2C_SDA: J1.48 U3.5 U4.1 | length 3784.8
  Top Layer (*.GTL) w5: U4.1@3109.25,755.91 v1(3109.25,817.91)
  Mid-Layer 1 (*.G1) w5: v1(24.61,86.61) 285.94,347.95 285.94,503.92 437.38,655.35 944.47,655.35 1010.83,589 1704.33,589 1729.33,614 v1(1811,614) 1825.5,599.5 2865.5,599.5 3063.18,797.18 3063.18,803.35 3074.6,814.78 3106.11,814.78 v1(3109.25,817.91)
  Bottom Layer (GBL) w5: v1(24.61,86.61) 94.29,86.61 U3.5@95.47,85.43 ; J1.48@1810.99,512.06 v1(1811,614)
I2C_SDA_0: P2.4 R16.1 U5.3 | length 383.1
  Top Layer (*.GTL) w5: v1(3031.5,1012.8) 3046.26,1012.8 3058.07,1000.98 U5.3@3058.07,973.43 ; P2.4@3169.29,823.62 3240.08,823.62 R16.1@3245.08,818.62
  Mid-Layer 1 (*.G1) w5: v1(3031.5,1012.8) 3031.5,961.42 P2.4@3169.29,823.62
I2C_SDA_1: P2.6 R17.1 U5.1 | length 175.6
  Top Layer (*.GTL) w5: U5.1@3109.25,973.43 3109.25,1002.95 3129.92,1023.62 P2.6@3169.29,1023.62 3244.37,1023.62 R17.1@3246.06,1025.31
NetP1_1: P1.1 RN3.7 S1.1 | length 875.2
  Top Layer (*.GTL) w5: S1.1@2905,1035 3070.43,1035 3213.58,1178.15 P1.1@3213.58,1252.95
  Bottom Layer (GBL) w5: RN3.7@2864.49,1106.06 3105.28,1106.06 3213.58,1214.37 P1.1@3213.58,1252.95
NetP1_2: P1.2 RN3.5 S1.2 | length 707.1
  Top Layer (*.GTL) w5: S1.2@2855,1035 2855,1040.61 2886.89,1072.5 2945.77,1072.5 3113.58,1240.31 P1.2@3113.58,1252.95
  Bottom Layer (GBL) w5: RN3.5@2832.99,1106.06 2848.33,1121.4 2848.33,1131.81 2852.72,1136.2 2987.78,1136.2 3104.53,1252.95 P1.2@3113.58,1252.95
NetP1_3: P1.3 RN3.3 S1.3 | length 590.8
  Top Layer (*.GTL) w5: S1.3@2805,1035 2805,1040.61 3013.58,1249.19 P1.3@3013.58,1252.95
  Bottom Layer (GBL) w5: RN3.3@2801.5,1106.06 2816.83,1121.4 2816.83,1131.81 2864.53,1179.51 2952.78,1179.51 3013.58,1240.31 P1.3@3013.58,1252.95
NetP1_4: P1.4 RN3.1 S1.4 | length 494.2
  Top Layer (*.GTL) w5: S1.4@2755,1035 2755,1053.23 2913.58,1211.81 P1.4@2913.58,1252.95
  Bottom Layer (GBL) w5: RN3.1@2770,1106.06 2770,1116.47 2906.48,1252.95 P1.4@2913.58,1252.95
NetP1_5: P1.5 RN4.7 S1.5 | length 469.2
  Top Layer (*.GTL) w5: S1.5@2705,1035 2705,1040.61 2815.75,1151.35 2815.75,1250.79 P1.5@2813.58,1252.95
  Bottom Layer (GBL) w5: RN4.7@2674.49,1106.06 2813.58,1245.16 P1.5@2813.58,1252.95
NetP1_6: P1.6 RN4.5 S1.6 | length 421.9
  Top Layer (*.GTL) w5: S1.6@2655,1035 2655,1040.61 2715.75,1101.35 2715.75,1250.79 P1.6@2713.58,1252.95
  Bottom Layer (GBL) w5: RN4.5@2642.99,1106.06 2658.33,1121.4 2658.33,1131.81 2715.75,1189.23 2715.75,1250.79 P1.6@2713.58,1252.95
NetP1_7: P1.7 RN4.3 S1.7 | length 390.5
  Top Layer (*.GTL) w5: P1.7@2613.58,1252.95 2605,1244.37 S1.7@2605,1035 S1.7@2615.75,1045.75
  Bottom Layer (GBL) w5: P1.7@2613.58,1252.95 2611.5,1250.87 RN4.3@2611.5,1106.06 RN4.3@2615.75,1110.31
NetP1_8: P1.8 RN4.1 S1.8 | length 409.5
  Top Layer (*.GTL) w5: P1.8@2513.58,1252.95 2515.75,1250.79 2515.75,1074.25 S1.8@2555,1035
  Bottom Layer (GBL) w5: P1.8@2513.58,1252.95 2580,1186.54 RN4.1@2580,1106.06
NetP4_1: P4.1 R8.1 | length 81
  Top Layer (*.GTL) w5: P4.1@141.73,1023.35 148.39,1030 R8.1@220,1030
NetP4_2: P4.2 R11.1 | length 84
  Top Layer (*.GTL) w5: P4.2@141.73,923.35 143.39,925 R11.1@225,925
NetP4_3: P4.3 R5.1 | length 79
  Top Layer (*.GTL) w5: P4.3@141.73,823.35 143.39,825 R5.1@220,825
NetP4_4: P4.4 R14.1 | length 79.7
  Top Layer (*.GTL) w5: P4.4@141.73,723.35 145.08,720 R14.1@220,720
NetP6_1: P6.1 RN5.7 | length 770.2
  Mid-Layer 1 (*.G1) w5: P6.1@1194.49,1252.95 1194.49,1209.06 1205.71,1197.83 1205.71,1193.29 1220,1179 1373.74,1179 1493.2,1059.54 v1(1493.2,807.96)
  Bottom Layer (GBL) w5: v1(1493.2,807.96) 1493.2,807.76 1549.15,751.81 1549.15,741.4 RN5.7@1564.49,726.06
NetP6_2: P6.2 RN5.5 | length 842.6
  Mid-Layer 1 (*.G1) w5: P6.2@1094.49,1252.95 1101.38,1246.06 1101.38,1194.88 1127.26,1169 1356.16,1169 1469.16,1056 v1(1469.16,832)
  Bottom Layer (GBL) w5: v1(1469.16,832) 1469.16,800.31 1517.66,751.81 1517.66,741.4 RN5.5@1532.99,726.06
NetP6_3: P6.3 RN5.3 | length 920.1
  Mid-Layer 1 (*.G1) w5: P6.3@994.49,1252.95 994.49,1197.44 1032.93,1159 1345.65,1159 1445.12,1059.54 v1(1445.12,807.96)
  Bottom Layer (GBL) w5: v1(1445.12,807.96) 1445.12,792.85 1486.16,751.81 1486.16,741.4 RN5.3@1501.5,726.06
NetP6_4: P6.4 RN5.1 | length 989.4
  Mid-Layer 1 (*.G1) w5: P6.4@894.49,1252.95 894.49,1200 945.49,1149 1321.71,1149 1324.67,1146.04 1331.04,1146.04 1421.08,1056 v1(1421.08,832)
  Bottom Layer (GBL) w5: v1(1421.08,832) 1421.08,774.99 RN5.1@1470,726.06
NetP6_5: P6.5 RN6.7 | length 1040.1
  Mid-Layer 1 (*.G1) w5: P6.5@794.49,1252.95 794.49,1217.32 872.81,1139 1317.57,1139 1397.03,1059.54 v1(1397.03,807.96)
  Bottom Layer (GBL) w5: v1(1397.03,807.96) 1397.03,759.37 1404.49,751.91 RN6.7@1404.49,726.06
NetP6_6: P6.6 RN6.5 | length 1109
  Mid-Layer 1 (*.G1) w5: P6.6@694.49,1252.95 694.49,1220.47 785.96,1129 1299.99,1129 1372.99,1056 v1(1372.99,832)
  Bottom Layer (GBL) w5: RN6.5@1372.99,726.06 v1(1372.99,832)
NetP6_7: P6.7 RN6.3 | length 1171.1
  Mid-Layer 1 (*.G1) w5: P6.7@594.49,1252.95 609.64,1252.95 743.6,1119 1289.49,1119 1348.95,1059.54 v1(1348.95,807.96)
  Bottom Layer (GBL) w5: RN6.3@1341.5,726.06 1341.5,751.91 1348.95,759.37 v1(1348.95,807.96)
NetP6_8: P6.8 RN6.1 | length 1248.1
  Mid-Layer 1 (*.G1) w5: P6.8@494.49,1252.95 526.97,1220.47 542.12,1220.47 653.6,1109 1271.91,1109 1324.91,1056 v1(1324.91,832)
  Bottom Layer (GBL) w5: RN6.1@1310,726.06 1310,751.91 1324.91,766.82 v1(1324.91,832)
NetP6_9: P6.9 RN7.7 | length 1343.3
  Mid-Layer 1 (*.G1) w5: P6.9@394.49,1252.95 426.97,1220.47 442.12,1220.47 563.6,1099 1261.4,1099 1300.87,1059.54 v1(1300.87,807.96)
  Bottom Layer (GBL) w5: RN7.7@1244.49,726.06 1300.87,782.44 v1(1300.87,807.96)
NetP6_10: P6.10 RN7.5 | length 1420.3
  Mid-Layer 1 (*.G1) w5: P6.10@294.49,1252.95 326.97,1220.47 342.12,1220.47 473.6,1089 1243.83,1089 1276.83,1056 v1(1276.83,832)
  Bottom Layer (GBL) w5: RN7.5@1212.99,726.06 1228.33,741.4 1228.33,751.81 1276.83,800.31 v1(1276.83,832)
NetP6_11: P6.11 RN7.3 | length 1501.4
  Mid-Layer 1 (*.G1) w5: P6.11@194.49,1252.95 209.64,1252.95 383.6,1079 1233.32,1079 1252.78,1059.54 v1(1252.78,807.96)
  Bottom Layer (GBL) w5: RN7.3@1181.5,726.06 1196.83,741.4 1196.83,751.81 1252.78,807.76 v1(1252.78,807.96)
NetP6_12: P6.12 RN7.1 | length 1580.9
  Mid-Layer 1 (*.G1) w5: P6.12@94.49,1252.95 126.97,1220.47 142.12,1220.47 293.6,1069 1220,1069 1228.74,1060.26 v1(1228.74,832)
  Bottom Layer (GBL) w5: RN7.1@1150,726.06 1165.33,741.4 1165.33,751.81 1228.74,815.22 v1(1228.74,832)
NetR1_1: R1.1 R2.2 U1.2 | length 178.5
  Top Layer (*.GTL) w5: R2.2@1925,865 R1.1@1925,935 U1.2@2033.54,935